# Altium PCB PCB2.PcbDoc
Units mil, origin at the board's own origin, x right, y up, seen from the top; angles counter-clockwise.
Board outline 4855 x 4000 mil, 2 copper layers (Top Layer, Bottom Layer); 30 components, 24 nets, 161 pads, 6 vias.
Unrouted connection lines stored in the file: 3.
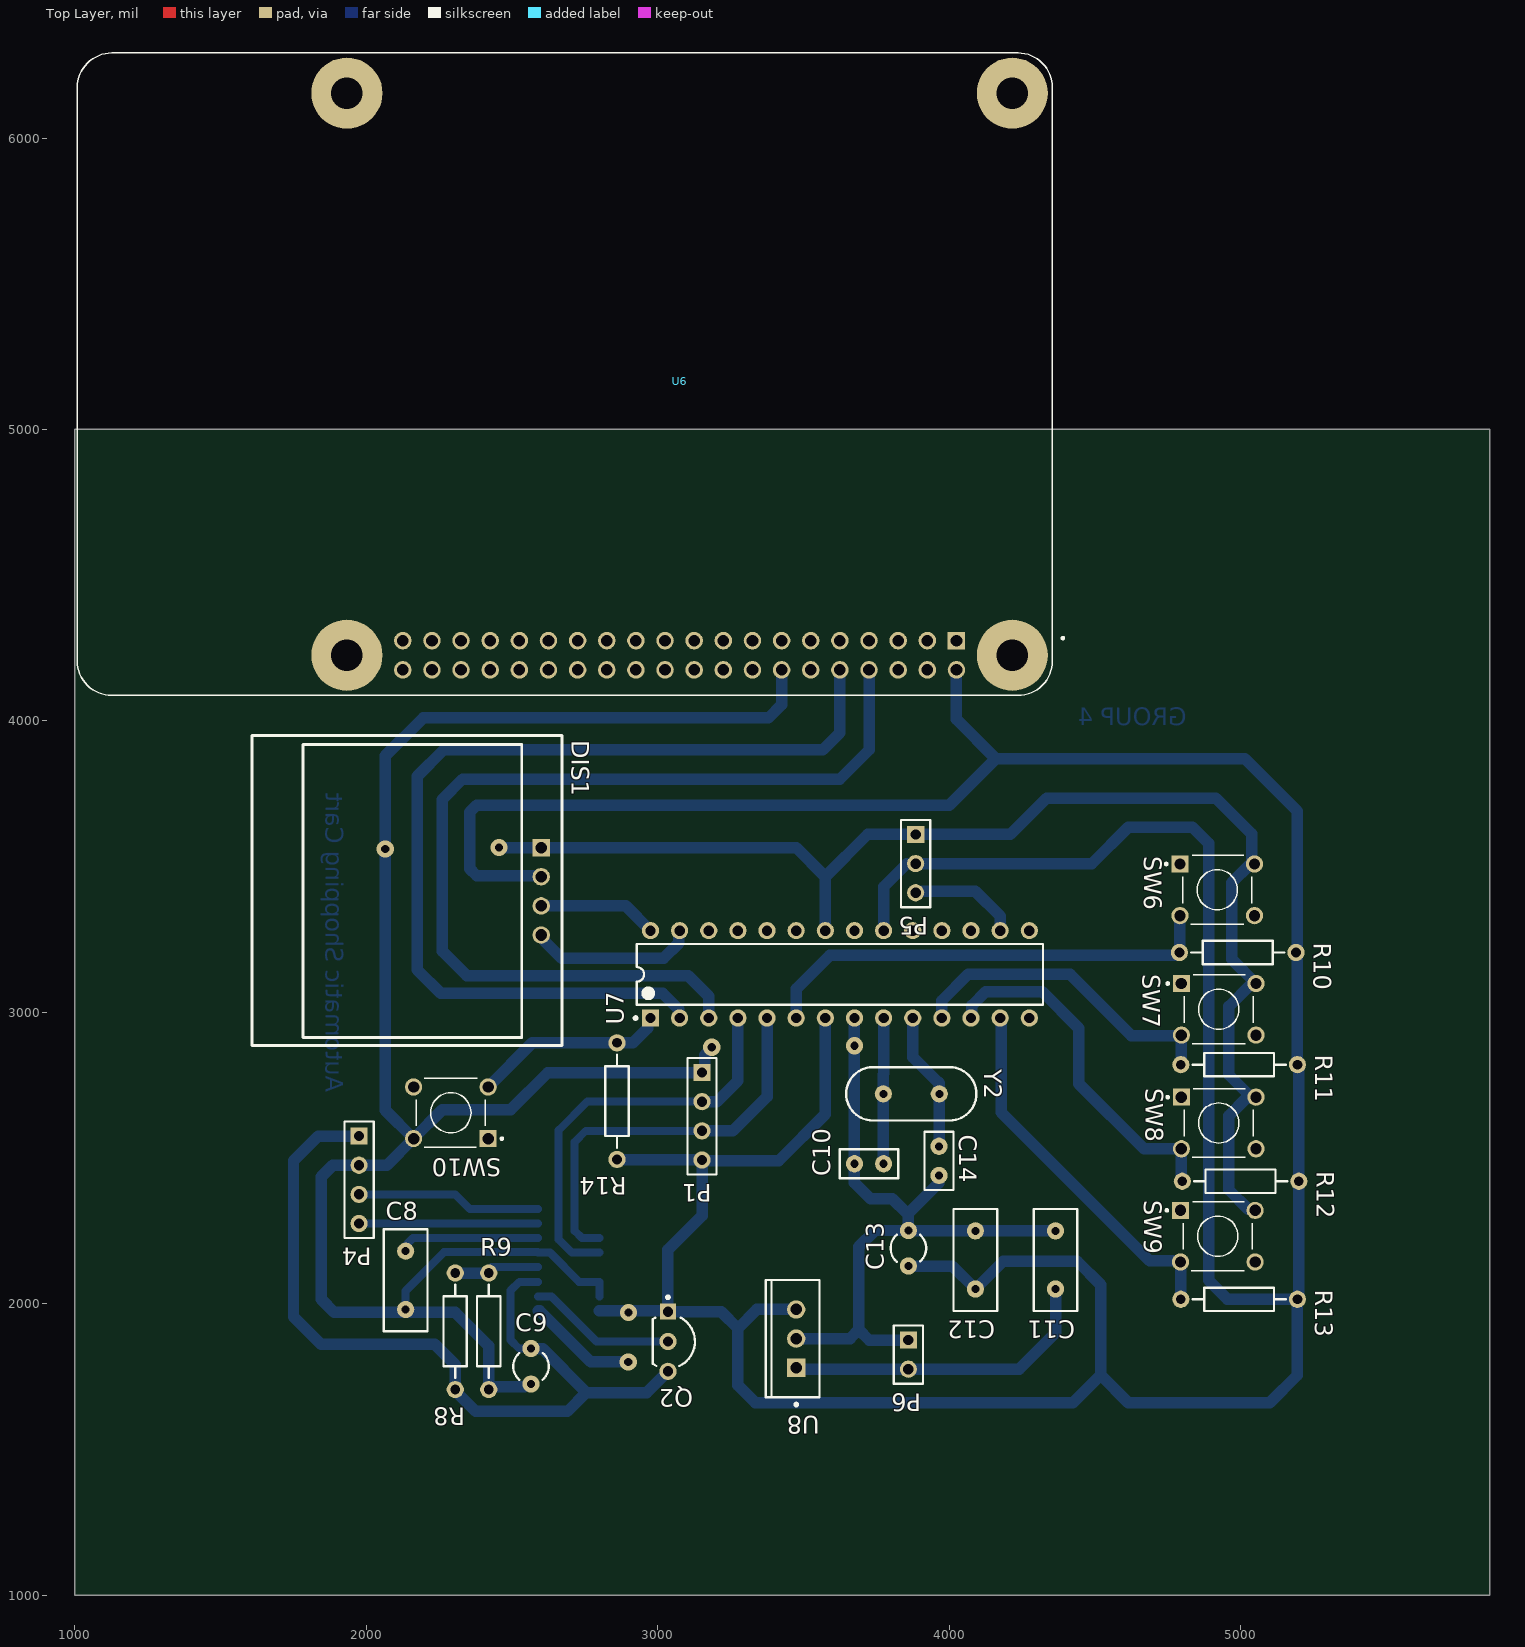
[diagram p0: Top Layer view]
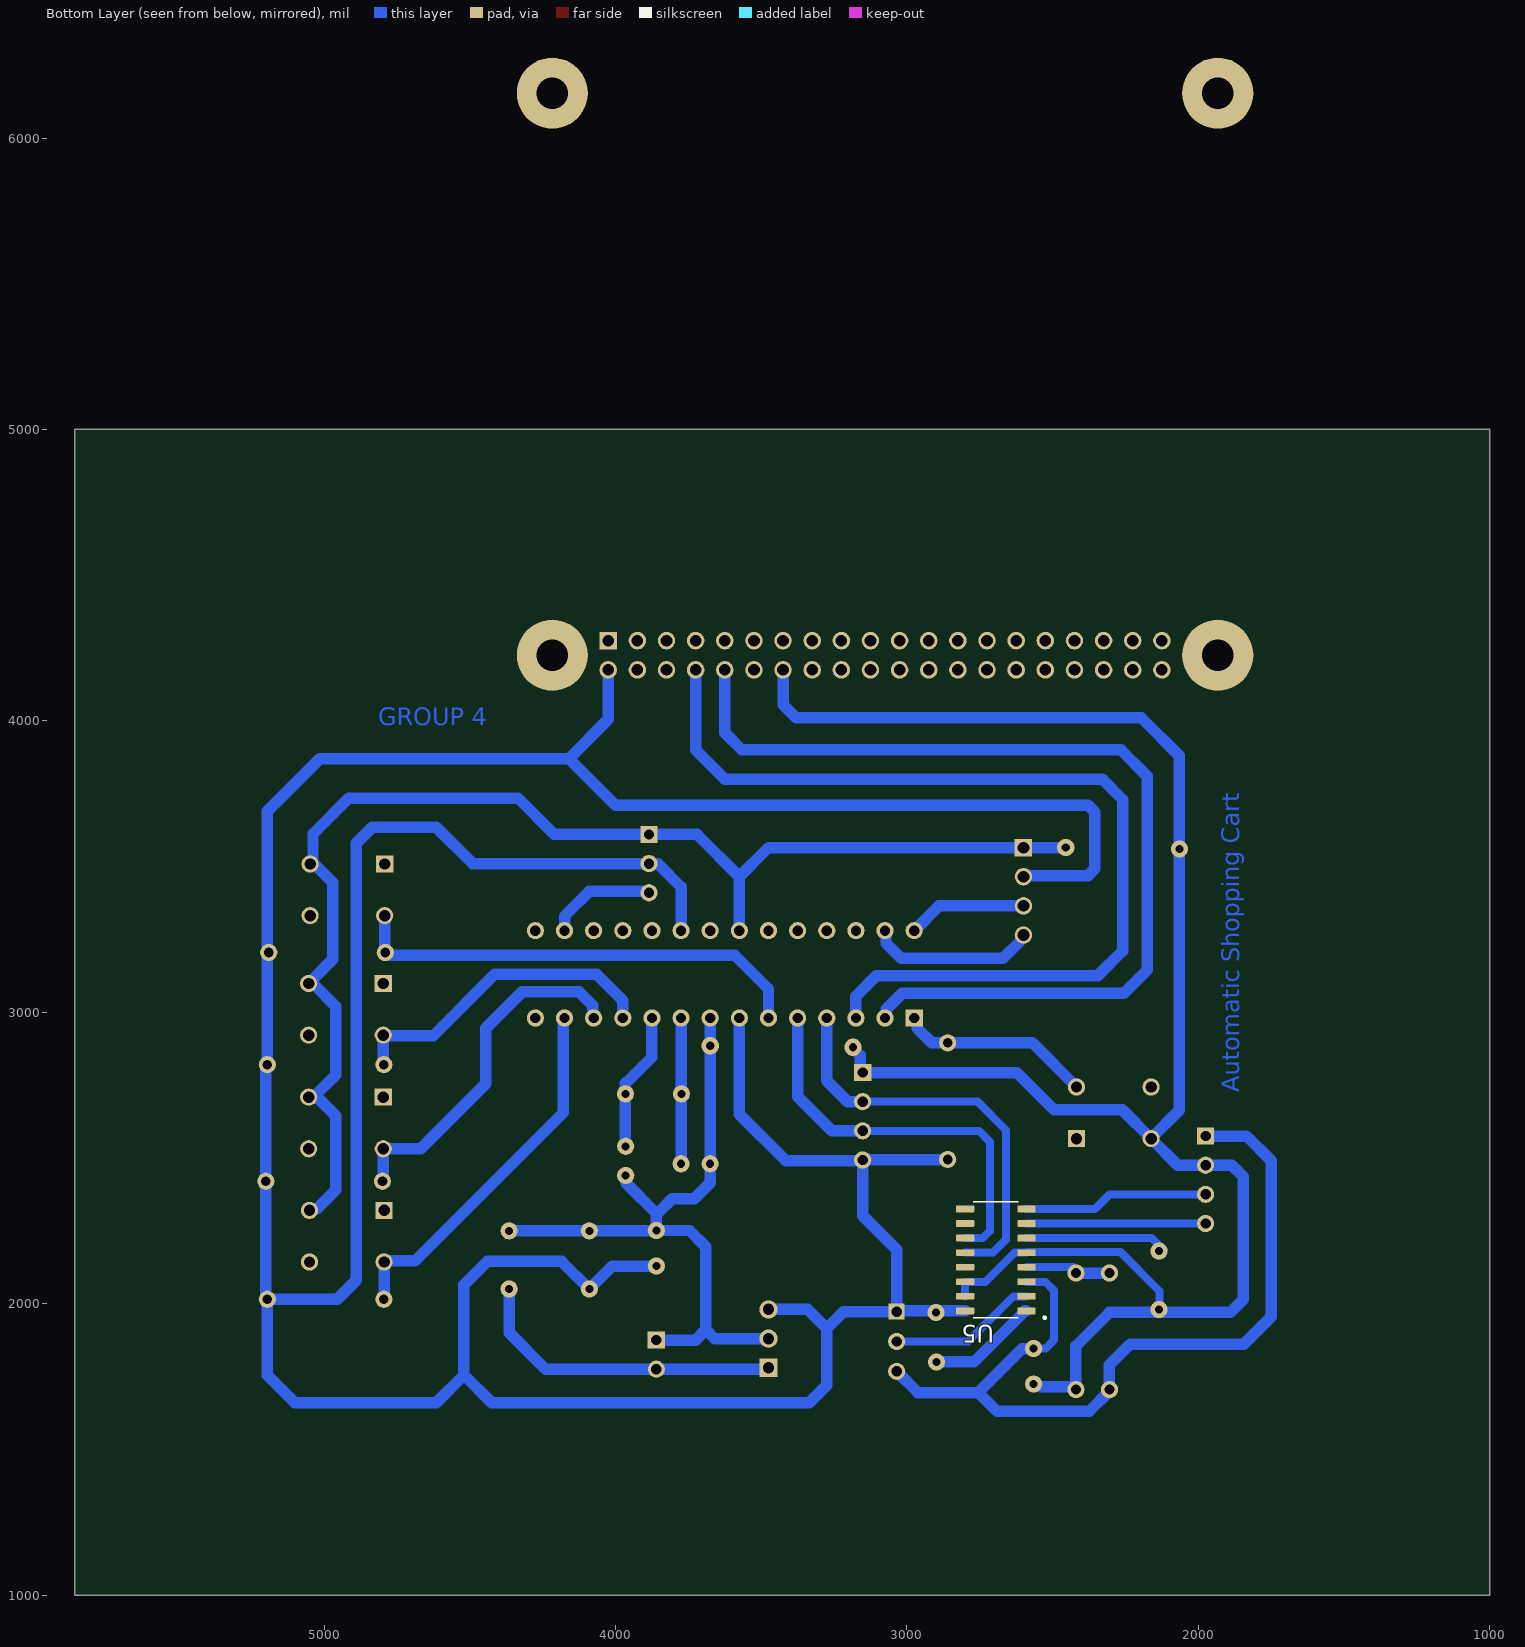
[diagram p1: Bottom Layer view, seen from below]

## Layer stack, top to bottom
Top Solder: solder mask 0.4, Solder Resist, Dk 3.5
Top Layer: signal copper 1.4
Dielectric 1: dielectric 12.6, FR-4, Dk 4.8
Bottom Layer: signal copper 1.4
Bottom Solder: solder mask 0.4, Solder Resist, Dk 3.5

## Board outline
1000,1000 5855,1000 5855,5000 1000,5000

## Design rules (kind name [scope] priority, off if disabled: settings)
Clearance [All] p1: gap=10 ignorepadtopadclearanceinfootprint=FALSE except(0: Arc-Hole Track-Hole SMDPad-Hole THPad-Hole Via-Hole Fill-Hole Poly-Hole Region-Hole Text-Hole)
PolygonConnect [All] p1: connectstyle=Relief reliefconductorwidth=10 reliefentries=4 polygonreliefangle="90 Angle" airgapwidth=10
RoutingVias [All] p1: holewidth=28 width=50 viastyle="Through Hole" minholewidth=28 minwidth=50 maxholewidth=28 maxwidth=50
SolderMaskExpansion [All] p1: expansion=4 istentingtop=FALSE
Width [All] p1: maxlimit=39.37 minlimit=23.62 preferedwidth=39.37 toplayer_minwidth=39.37 minimp=50.000000 maximp=50.000000 favimp=50.000000
30 further rules are at their usual default settings.

## Components (designator, comment, footprint, x,y, rotation, side; value= is the part's Value field where it differs from the comment)
C8 "Cap" RAD-0.2 2135,2080 r90 top value=100nF
C9 "Cap2" R38 2565,1785 r0 top value=10uF
C10 "Cap" RAD-0.1 3725,2480 r180 top value=22pF
C11 "Cap" RAD-0.2 4365,2150 r270 top value=100nF
C12 "Cap" RAD-0.2 4090,2150 r270 top value=100nF
C13 "Cap2" R38 3860,2190 r180 top value=10uF
C14 "Cap" RAD-0.1 3965,2490 r270 top value=22pF
DIS1 "OLED Display" OLED12864I2C 1618.1,3943.98 r270 top
P1 "HX711" HDR1X4 3151.88,2793.12 r270 top
P4 "Load Cell" HDR1X4 1975,2575 r270 top
P5 "Motor" HDR1X3 3885,3610 r270 top
P6 "Header 2" HDR1X2 3860,1875 r270 top
Q2 "2N4403" ONSC-TO-92-3-29-11_AM_BL 3035,1870 r270 top
R8 "" AXIAL-0.4 2305,1905 r270 top value=10K
R9 "" AXIAL-0.4 2420,1905 r90 top value=10K
R10 "" AXIAL-0.4 4990,3205 r0 top value=10K
R11 "" AXIAL-0.4 4995,2820 r0 top value=10K
R12 "" AXIAL-0.4 5000,2420 r0 top value=10K
R13 "" AXIAL-0.4 4995,2015 r0 top value=10K
R14 "" AXIAL-0.4 2860,2695 r270 top value=10K
SW6 "1825910-6" SW_1825910-6-4 4920,3420 r0 top
SW7 "1825910-6" SW_1825910-6-4 4925,3010 r0 top
SW8 "1825910-6" SW_1825910-6-4 4925,2620 r0 top
SW9 "1825910-6" SW_1825910-6-4 4922.05,2231.42 r0 top
SW10 "1825910-6" SW_1825910-6-4 2290,2655 r180 top
U5 "HX711" SOP127P600X180-16N 2694.88,2150 r0 bottom
U6 "RASPBERRY_PI_3_MODEL_B+" MODULE_RASPBERRY_PI_3_MODEL_B+ 2681.3,5189.57 r180 top
U7 "ATmega328-PU" 28P3 3625,3130 r90 top
U8 "LM7805CT" FAIR-TO-220-3 3475,1880 r180 top
Y2 "XTAL 16MHz" FOX-FOXSLF-2_V 3870,2720 r0 top

## Footprints (in the part's own frame and the unit in brackets; to place one, negate y for a bottom-side part, rotate by r counter-clockwise, add the part's x,y. Pads: shape width x height; smd on the part's side, far side on the other; paste and mask are expansions set on the pad)
28P3 [mm] "28-Pin Plastic Dual In-Line Package (PDIP)"
  rect 1.5x1.5 hole 0.9: 1(-3.81,16.51)
  round 1.5 hole 0.9: 2(-3.81,13.97) 3(-3.81,11.43) 4(-3.81,8.89) 5(-3.81,6.35) 6(-3.81,3.81) 7(-3.81,1.27) 8(-3.81,-1.27) 9(-3.81,-3.81) 10(-3.81,-6.35) 11(-3.81,-8.89) 12(-3.81,-11.43) 13(-3.81,-13.97) 14(-3.81,-16.51) 15(3.81,-16.51) 16(3.81,-13.97) 17(3.81,-11.43) 18(3.81,-8.89) 19(3.81,-6.35) 20(3.81,-3.81) 21(3.81,-1.27) 22(3.81,1.27) 23(3.81,3.81) 24(3.81,6.35) 25(3.81,8.89) 26(3.81,11.43) 27(3.81,13.97) 28(3.81,16.51)
  silkscreen extent -3.93,-17.7 2.65,17.93, body extent -3.6,-17.65 3.6,17.65, height 4.58
AXIAL-0.4 [mm] "Axial Device, Thru-Hole; 2 Leads; 0.4 in Pin Spacing"
  round 1.5 hole 0.85: 1(-5.08,0) 2(5.08,0)
  silkscreen extent -4.06,-1.02 4.06,1.02
FAIR-TO-220-3 [mm] "FM, 3-Leads, Body 10.2x4.7mm, Pitch 2.54mm"
  rect 1.6x1.6 hole 1: 1(0,2.54)
  round 1.6 hole 1: 2(0,0) 3(0,-2.54)
  silkscreen extent -2.04,-5.1 2.66,5.87, body extent -2.04,-5.1 2.66,5.1, height 18.95
FOX-FOXSLF-2_V [mm] "THD, 2-Leads, Body 11.35x4.65mm, Pitch 4.88mm"
  round 1.5 hole 0.7: 1(-2.44,0) 2(2.44,0)
  silkscreen extent -5.68,-2.32 5.68,2.32, body extent -5.67,-2.32 5.68,2.32, height 3.6
HDR1X2 [mm] "Connector; Header; 2 Position"
  rect 1.5x1.5 hole 0.9: 1(0,0)
  round 1.5 hole 0.9: 2(2.54,0)
  silkscreen extent -1.27,-1.27 3.81,1.27
HDR1X3 [mm] "Connector; Header; 3 Position"
  rect 1.5x1.5 hole 0.9: 1(0,0)
  round 1.5 hole 0.9: 2(2.54,0) 3(5.08,0)
  silkscreen extent -1.27,-1.27 6.35,1.27
HDR1X4 [mm] "Connector; Header; 4 Position"
  rect 1.5x1.5 hole 0.9: 1(0,0)
  round 1.5 hole 0.9: 2(2.54,0) 3(5.08,0) 4(7.62,0)
  silkscreen extent -1.27,-1.27 8.89,1.27
MODULE_RASPBERRY_PI_3_MODEL_B+ [mil]
  rect 60x60 hole 40: 1(-1343.7,914.57)
  round 60 hole 40: 2(-1343.7,1014.57) 3(-1243.7,914.57) 4(-1243.7,1014.57) 5(-1143.7,914.57) 6(-1143.7,1014.57) 7(-1043.7,914.57) 8(-1043.7,1014.57) 9(-943.7,914.57) 10(-943.7,1014.57) 11(-843.7,914.57) 12(-843.7,1014.57) 13(-743.7,914.57) 14(-743.7,1014.57) 15(-643.7,914.57) 16(-643.7,1014.57) 17(-543.7,914.57) 18(-543.7,1014.57) 19(-443.7,914.57) 20(-443.7,1014.57) 21(-343.7,914.57) 22(-343.7,1014.57) 23(-243.7,914.57) 24(-243.7,1014.57) 25(-143.7,914.57) 26(-143.7,1014.57) 27(-43.7,914.57) 28(-43.7,1014.57) 29(56.3,914.57) 30(56.3,1014.57) 31(156.3,914.57) 32(156.3,1014.57) 33(256.3,914.57) 34(256.3,1014.57) 35(356.3,914.57) 36(356.3,1014.57) 37(456.3,914.57) 38(456.3,1014.57) 39(556.3,914.57) 40(556.3,1014.57)
  round 244.09 hole 108.27: S1(-1535.43,964.57) S2(748.03,964.57) S3(748.03,-964.57) S4(-1535.43,-964.57)
  silkscreen extent -1713,-1102 1673,1102
OLED12864I2C [mil]
  rect 60x60 hole 40: 1(378.98,981.9)
  round 60 hole 40: 2(478.98,981.9) 3(578.98,981.9) 4(678.98,981.9)
  silkscreen extent -5,-10 1058,1053
ONSC-TO-92-3-29-11_AM_BL [mm] "TO, 3-Leads, Body Dia 4.7mm, Pitch 2.6mm"
  rect 1.4x1.4 hole 0.9: 1(-2.6,0)
  round 1.5 hole 0.9: 2(0,0) 3(2.6,0)
  silkscreen extent -3.97,-1.34 2.13,2.35, body extent -2.84,-1.34 2.84,2.35, height 5.33
R38 [mm] "Crystal, Thru-Hole; 2 Leads; Body 3.1 x 8.2 mm (Dia.xH)"
  round 1.5 hole 0.7: 1(0,1.55) 2(0,-1.55)
  silkscreen extent -1.55,-1.19 1.55,1.17
RAD-0.1 [mm] "Radial Cap, Thru-Hole; 2 Leads; 0.1 in Pin Spacing"
  round 1.5 hole 0.7: 1(-1.27,0) 2(1.27,0)
  silkscreen extent -2.54,-1.27 2.54,1.27
RAD-0.2 [mm] "Radial Cap, Thru-Hole; 2 Leads; 0.2 in Pin Spacing"
  round 1.5 hole 0.7: 1(-2.54,0) 2(2.54,0)
  silkscreen extent -4.44,-1.91 4.44,1.91
SOP127P600X180-16N [mm]
  rrect25% 1.58x0.59 smd: 1(-2.67,4.445) 2(-2.67,3.175) 3(-2.67,1.905) 4(-2.67,0.635) 5(-2.67,-0.635) 6(-2.67,-1.905) 7(-2.67,-3.175) 8(-2.67,-4.445) 9(2.67,-4.445) 10(2.67,-3.175) 11(2.67,-1.905) 12(2.67,-0.635) 13(2.67,0.635) 14(2.67,1.905) 15(2.67,3.175) 16(2.67,4.445)
  silkscreen extent -4.35,-5.06 1.95,5.13
SW_1825910-6-4 [mm]
  rect 1.498x1.498 hole 0.99: 1(-3.25,2.25)
  round 1.5 hole 0.99: 2(3.25,2.25) 3(-3.25,-2.25) 4(3.25,-2.25)
  silkscreen extent -4.54,-3 3,3

## Part data
C8 C9 C10 C11 C12 C13 C14: "Capacitor", Publisher="Altium Limited"
  C8 C10 C11 C12 C14: LatestRevisionDate=17-Jul-2002, LatestRevisionNote="Re-released for DXP Platform.", PackageDescription="Radial Cap, Thru-Hole; 2 Leads; 0.3 in Pin Spacing", PackageReference=RAD-0.3, Published=8-Jun-2000
  C9 C13: PackageDescription="Capacitor; 2 Leads", PackageReference=CAPR5-4X5, Published=23-Sep-2002
DIS1: library part OLED12864I2C
P1: library part "Header 4", "Header, 4-Pin", LatestRevisionDate=17-Jul-2002, LatestRevisionNote="Re-released for DXP Platform.", Publisher="Altium Limited"
P4: library part "Header 4", "Load Cell Connector, 4-Pin", LatestRevisionDate=17-Jul-2002, LatestRevisionNote="Re-released for DXP Platform.", Publisher="Altium Limited"
P5: library part "Header 3", "Header, 3-Pin", LatestRevisionDate=17-Jul-2002, LatestRevisionNote="Re-released for DXP Platform.", Publisher="Altium Limited"
P6: "Header, 2-Pin", LatestRevisionDate=17-Jul-2002, LatestRevisionNote="Re-released for DXP Platform.", Publisher="Altium Limited"
Q2: library part CMP-1048-01491-1, "General Purpose Transistor, NPN Silicon, 3-Pin TO-92, Pb-Free, Ammo Box", Manufacturer="On Semiconductor", PartNumber=2N4401RLRPG, ComponentLink1Description="Manufacturer URL", ComponentLink1URL=http://www.onsemi.com/, ComponentLink2Description=Datasheet, ComponentLink2URL=http://www.onsemi.com/pub_link/Collateral/2N4401-D.PDF, ComponentLink3Description="Package Specification", ComponentLink3URL=http://www.onsemi.com/pub_link/Collateral/MAC97-D.PDF, DatasheetVersion="Rev. 4", fT Min (MHz)=250, IC Continuous (A)=0.6, Mounting Technology="Through Hole", PackageDescription="3-Pin Transistor Outline, Body 4.825 x 3.685 mm, Pitch 1.27 mm", PackageReference=TO-92-3-29-11_AM_BL, PackageVersion="Rev. AM", Packing="Ammo Box", Polarity=NPN, RoHS=TRUE
R8 R9 R10 R11 R12 R13 R14: library part Res2, "Resistor", LatestRevisionDate=17-Jul-2002, LatestRevisionNote="Re-released for DXP Platform.", PackageDescription="Axial Device, Thru-Hole; 2 Leads; 0.4 in Pin Spacing", PackageReference=AXIAL-0.4, Published=8-Jun-2000, Publisher="Altium Limited"
SW6 SW7 SW8 SW9 SW10: "Switch Tactile OFF (ON) SPST Round Button PC Pins 0.05A 24VDC 100000Cycles 1.57N Thru-Hole Loose", Package=None, Availability=Unavailable, MP=1825910-6, Price=None
U5: Package=None, Availability=Unavailable, MP=HX711, Price=None
U6: "BCM2835 Raspberry Pi Model B+ - ARM11, VideoCore MPU Embedded Evaluation Board", Package=None, Availability=Unavailable, MP=RASPBERRY_PI_3_MODEL_B+, Price=None
U7: library part CMP-0095-00015-2, "8-bit AVR Microcontroller, 32KB Flash, 1KB EEPROM, 2KB SRAM, 28-pin PDIP, Industrial Grade (-40°C to 85°C)", ComponentLink1Description="Manufacturer URL", ComponentLink1URL=http://www.atmel.com/, ComponentLink2Description="ATmega48A/48PA/88A/88PA/168A/168PA/328/328P Datasheet", ComponentLink2URL=http://www.atmel.com/dyn/resources/prod_documents/8271.pdf, ComponentLink3Description="ATmega48A/48PA/88A/88PA/168A/168PA/328/328P Summary", ComponentLink3URL=http://www.atmel.com/dyn/resources/prod_documents/8271S.pdf, DatasheetVersion="revD, May-2011", PackageDescription="28-lead (0.300\"/7.62mm Wide) Plastic Dual Inline Package (PDIP)", PackageReference=28P3, PackageVersion="revB, Sep-2001", RevisionNote="DatasheetVersion updated. URLs added."
U8: library part CMP-2000-04938-1, "Positive Voltage Regulator, 5 V, 1 A, -40 to 125 degC, 3-Pin TO-220, RoHS, Tube", Manufacturer=FairchildSemiconductor, Maximum Input Voltage=35V, Maximum Output Current=2.2(Typ)A, Maximum Quiescent Current=8mA, Operating Temperature=-40to125degC, Output Voltage=5V, Package=3TO-220AB, Package Description="3-Pin Through Hole Device, Body 10 x 4.5 mm, Pitch 2.54 mm", Package Reference=TO-220, Typical Dropout Voltage @ Current=2@1AV, Accuracy=±4%, Category=LinearRegulator, Datasheet URL=https://datasheet.ciiva.com/26904/lm7805ct-26904988.pdf, Datasheet Version=Aug-12, Line Regulation=100mV, Load Regulation=100mV, Manufacturer URL=https://www.fairchildsemi.com/, Mounting=ThroughHole, Number of Outputs=1, Output Type=Fixed, Package URL=https://www.fairchildsemi.com/package-drawings/TO/TO220B03.pdf, Packaging=Rail/Tube, Polarity=Positive, Rad Hard=No, Type=Linear
Y2: library part CMP-1749-00004-1, "Resistance Weld Thru-Hole Crystal, 12 MHz, +/-30 ppm, -20 to 70 degC, 2-Pin THD, RoHS, Bulk", Case\Package=TO-251-3, Input Capacitance="350 pF", Max Operating Temperature="150 degC", Max Power Dissipation="2.5 W", Min Operating Temperature="-55 degC", Package Quantity=70, ComponentLink1Description="Manufacturer URL", ComponentLink1URL=http://www.foxonline.com/, ComponentLink2Description=Datasheet, ComponentLink2URL=http://www.foxonline.com/pdfs/hc49slf.pdf, DatasheetVersion=Mar-15, Elements=1, Height="6.1 mm", Length="6.6 mm", Mount="Through Hole", PackageDescription="2-Pin Through Hole Device, Body 11.35 x 4.65 mm, Pitch 4.88 mm", PackageReference=FOXSLF-2, Packaging=Rail/Tube, Pins=3, Radiation Hardening=No, Rds On Max="115 mohm", REACH SVHC="No SVHC", RoHSCompliant=true, Typical Rise Time="90 ns", Width="2.3 mm"

## Via types
v1: diameter 59.05, hole 28, Top Layer to Bottom Layer, 6 vias

## Nets (pads, with @x,y where several pads share a name; then routed paths per layer and width w, separated by ;. In a path a pad name is that pad's centre, name@x,y a point inside that pad or via, vN(x,y) a via of type N, cw(c..) or ccw(c..) an arc to the next point about the centre after c; other vN are vias at no path point)
+3V3: U6.1
+5: C12.2 C13.1 DIS1.2 P1.4 P5.2 Q2.1 R10.2 R11.2 R12.2 R13.2 R14.2 U5.1 U5.16 U6.2 U7.7 U7.20 U8.3 | length 14992.9
  Bottom Layer w39.37: U5.1 2595,1975 2770,1800 v1(2898.76,1800) ; DIS1.2 2596.05,3468.95 2378.06,3468.95 2355,3492.01 2355,3686.94 2378.06,3710 4000,3710 4160,3870 ; U5.16 2900,1975 Q2.1@3032.36,1975 ; R14.2 2861.88,2493.12 P1.4 3151.88,2301.88 3035,2185 Q2.1@3035,1980 ; Q2.1 3217.64,1972.36 3275,1915 ; P1.4@3178.06,2490.86 3415.86,2490.86 3575,2650 U7.7 ; U8.3 3340,1980 3275,1915 ; U7.20 3775,3430 3855,3510 ; C13.1 4011.02,2128.98 C12.2 4185,2145 4440,2145 4520,2065 4520,1770 ; P5.2 4490,3510 4615,3635 4835,3635 4890,3580 4890,2080 4955,2015 R13.2 ; U6.2 4025,4005 4160,3870 ; R10.2 R10.2@5195,3200 ; 3275,1915 3275,1720 3335,1660 4425,1660 4520,1755 4615,1660 5100,1660 5195,1755 R13.2 ; 4160,3870 5015,3870 5195,3690 R10.2@5195,3200 ; R13.2 5200,2020 R12.2 5200,2815 R11.2 R10.2@5195,3200
  other v1: 2900,1970
BTN1: R10.1 SW6.3 U7.6 | length 1589.9
  Bottom Layer w39.37: U7.6 3475,3080 3590,3195 R10.1@4790,3195 ; R10.1 4792.05,3207.05 SW6.3
BTN2: R11.1 SW7.3 U7.11 | length 1099.5
  Bottom Layer w39.37: U7.11 3975,3040 4065,3130 4415,3130 4625,2920 SW7.3@4787.99,2920 ; R11.1 4797.05,2822.05 SW7.3
BTN3: R12.1 SW8.3 U7.12 | length 1226.3
  Bottom Layer w39.37: U7.12 4078.27,2983.27 4078.27,3023.27 4125,3070 4320,3070 4445,2945 4445,2755 4668.58,2531.42 SW8.3 ; SW8.3@4797.05,2527.95 4797.05,2422.95 R12.1
BTN4: R13.1 SW9.3 U7.13 | length 1281.5
  Bottom Layer w39.37: U7.13 4178.77,2976.23 4178.77,2656.23 4688.41,2146.59 4790.34,2146.59 SW9.3 4794.09,2015.91 R13.1
DOUT: P1.2 U5.12 U7.4 | length 1434.1
  Bottom Layer w27.56: U5.12 2705,2175 2660,2220 2660,2595 2758.12,2693.12 P1.2
  Bottom Layer w39.37: P1.2 3203.12,2693.12 3275,2765 U7.4
E+: C9.1 P4.1 Q2.3 R8.2 U5.3 | length 2939.5
  Bottom Layer w27.56: C9.1 2564.26,1845.28 2524.72,1845.28 2495,1875 2495,2045 2525,2075 U5.3
  Bottom Layer w39.37: P4.1 1835,2575 1750,2490 1750,1955 1844.37,1860.63 2234.37,1860.63 2305,1790 R8.2 ; R8.2@2302.5,1702.5 2375,1630 2690,1630 2755,1695 ; C9.1@2560.54,1845.03 2604.97,1845.03 2755,1695 ; Q2.3 2962.36,1695 2755,1695
GND: C8.1 C9.2 C10.2 C11.1 C12.1 C13.2 C14.2 DIS1.1 P1.1 P4.2 P5.1 P6.1 R9.1 SW6.2 SW7.2 SW8.2 SW9.2 SW10.2 U5.5 U5.14 U5.15 U6.14 U7.8 U7.22 U8.2 | length 13662.1
  Bottom Layer w27.56: C8.1@2120,1970 2133.85,1983.85 2133.85,2043.85 2267.17,2177.17 2587.6,2177.17 U5.5 2630,2175 2730,2075 U5.14 U5.15
  Bottom Layer w39.37: C8.1@2120,1970 2305,1970 2420,1855 R9.1 2425.33,1705 2435.33,1715 2542.1,1715 2547.31,1720.21 2561.23,1720.21 C9.2 ; C8.1@2126.07,1976.07 2125.91,1976.23 2119.67,1970 1890,1970 1845,2015 1845,2435 1885,2475 P4.2 2070.63,2475 SW10.2 ; v1(2455,3565) 3475,3565 3575,3465 ; v1(3185,2880) 3185,2877.12 3160.67,2852.8 3160.67,2801.91 P1.1 2623.12,2793.12 2495,2665 2260.63,2665 SW10.2 ; U6.14 3425,4055 3380,4010 2775,4010 2195,4010 2065,3880 v1(2065,3560) 2065,2663.46 SW10.2 ; U8.2@3480,1875 U8.2 3660,1880 3690,1910 ; U7.22 3575,3465 ; U7.8 3675,2415 3730,2360 3805,2360 3857.5,2307.5 ; P6.1 3725,1875 3690,1910 ; P5.1 3720,3610 3575,3465 ; P5.1@3890,3610 4210,3610 4335,3735 4915,3735 5038.15,3611.85 5038.15,3523.69 SW6.2@5043.42,3518.42 ; C14.2 3963.49,2438.49 3963.49,2413.49 3857.5,2307.5 ; C11.1 C12.1 3861.02,2250 C13.2 ; SW8.2@5032.67,2712.33 4960,2785 4960,3020 5034.83,3094.83 5049.2,3094.83 SW7.2 4970,3181.54 4970,3445 5029.83,3504.83 5038.15,3504.83 5044.2,3504.83 SW6.2 ; SW9.2 5046.25,2323.75 5026.25,2323.75 4960,2390 4960,2645 5019.83,2704.83 5049.2,2704.83 SW8.2 ; 3690,1910 3690,2195 3746.02,2251.02 C13.2 ; 3857.5,2307.5 3860,2305 C13.2
  other v1: 3675,2885
NetC8_2: C8.2 U5.6 | length 486.3
  Bottom Layer w27.56: C8.2@2120,2185 2160,2225 U5.6
NetC10_1: C10.1 U7.9 Y2.1 | length 502.8
  Top Layer w39.37: Y2.1@3775,2725 3777.87,2722.13 Y2.1@3777.87,2720
  Bottom Layer w39.37: C10.1@3770,2480 3770,2482.13 3773.94,2486.07 3773.94,2755 3773.94,2785 ; 3775,2790 U7.9
NetC14_1: C14.1 U7.10 Y2.2 | length 482.5
  Bottom Layer w39.37: U7.10 3875,2846.06 3962.13,2758.94 3963.93,2758.94 3966.36,2756.51 3966.36,2755 ; C14.1@3966.06,2536.36 3966.06,2755
NetP4_3: P4.3 U5.8 | length 635.5
  Bottom Layer w27.56: P4.3 2305,2375 2355,2325 U5.8
NetP4_4: P4.4 U5.7 | length 614.8
  Bottom Layer w27.56: P4.4 U5.7
NetP5_3: P5.3 U7.16 | length 376.6
  Bottom Layer w39.37: P5.3@3885,3415.33 3886.56,3413.77 3902.69,3413.77 3904.25,3415.33 4089.67,3415.33 4175,3330 U7.16
NetQ2_2: Q2.2 U5.2 | length 509.4
  Bottom Layer w27.56: U5.2 2635,2025 2790,1870 Q2.2
PD_SCK: P1.3 U5.11 U7.5 | length 1394.6
  Bottom Layer w27.56: U5.11 2740,2225 2715,2250 2715,2555 2753.12,2593.12 P1.3
  Bottom Layer w39.37: P1.3 3258.12,2593.12 3375,2710 U7.5
RST: R14.1 SW10.3 U7.1 | length 669.6
  Bottom Layer w39.37: SW10.3 2569.37,2895 R14.1 2915,2895 2965.16,2945.16 2965.16,2970.16 U7.1
RxD: U6.10 U7.2 | length 3376.7
  Bottom Layer w39.37: U7.2 3071.23,2983.77 3071.23,3010.07 3016.31,3065 2255,3065 2175,3145 2175,3810 2265,3900 3566.3,3900 3625,3958.7 U6.10
SCL: DIS1.3 U7.28 | length 410.2
  Bottom Layer w39.37: DIS1.3 2890,3365 U7.28
SDA: DIS1.4 U7.27 | length 576.8
  Bottom Layer w39.37: DIS1.4 2600,3259.42 2610.31,3249.1 2610.31,3244.69 2670,3185 3020,3185 3071.73,3236.73 3071.73,3276.73 U7.27
TxD: U6.8 U7.3 | length 3384.6
  Bottom Layer w39.37: U7.3 3175,3055 3105,3125 2345,3125 2260,3210 2260,3730 2330,3800 3625,3800 3725,3900 U6.8
VCC: C11.2 P6.2 U8.1 | length 1093.8
  Bottom Layer w39.37: U8.1 3480,1775 P6.2 4240,1775 4365,1900 C11.2
VFB: R8.1 R9.2 U5.4 | length 274.8
  Bottom Layer w27.56: R9.2@2430,2125 U5.4
  Bottom Layer w39.37: R8.1 R9.2
pads on no net: SW6.1 SW6.4 SW7.1 SW7.4 SW8.1 SW8.4 SW9.1 SW9.4 SW10.1 SW10.4 U5.9 U5.10 U5.13 U6.3 U6.4 U6.5 U6.6 U6.7 U6.9 U6.11 U6.12 U6.13 U6.15 U6.16 U6.17 U6.18 U6.19 U6.20 U6.21 U6.22 U6.23 U6.24 U6.25 U6.26 U6.27 U6.28 U6.29 U6.30 U6.31 U6.32 U6.33 U6.34 U6.35 U6.36 U6.37 U6.38 U6.39 U6.40 U6.S1 U6.S2 U6.S3 U6.S4 U7.14 U7.15 U7.17 U7.18 U7.19 U7.21 U7.23 U7.24 U7.25 U7.26

## Other copper
Bottom Layer:
  text "GROUP 4" at 4815,3985 h60
  text "Automatic Shopping Cart" at 1859.99,2725 h60 r270